# EAGLE board HoloProjector I2C  v1.1 (EAGLE 6.4)
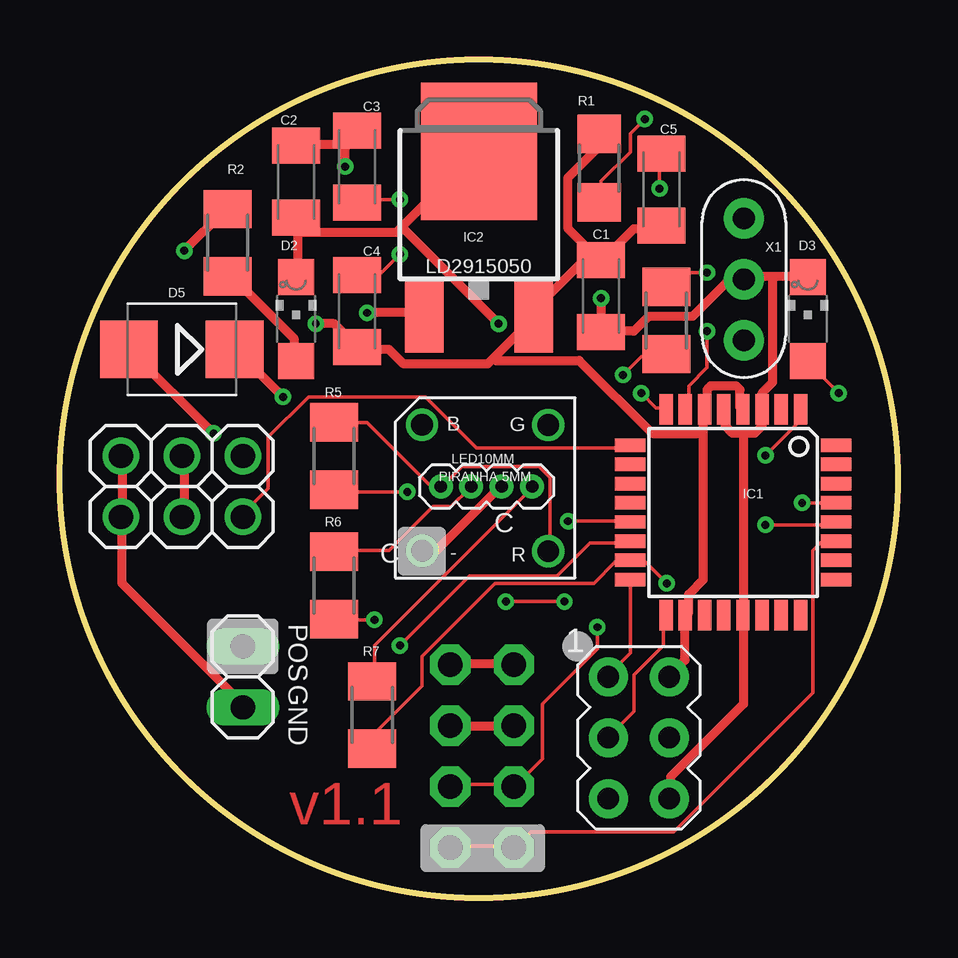
[diagram p0: board, top side]
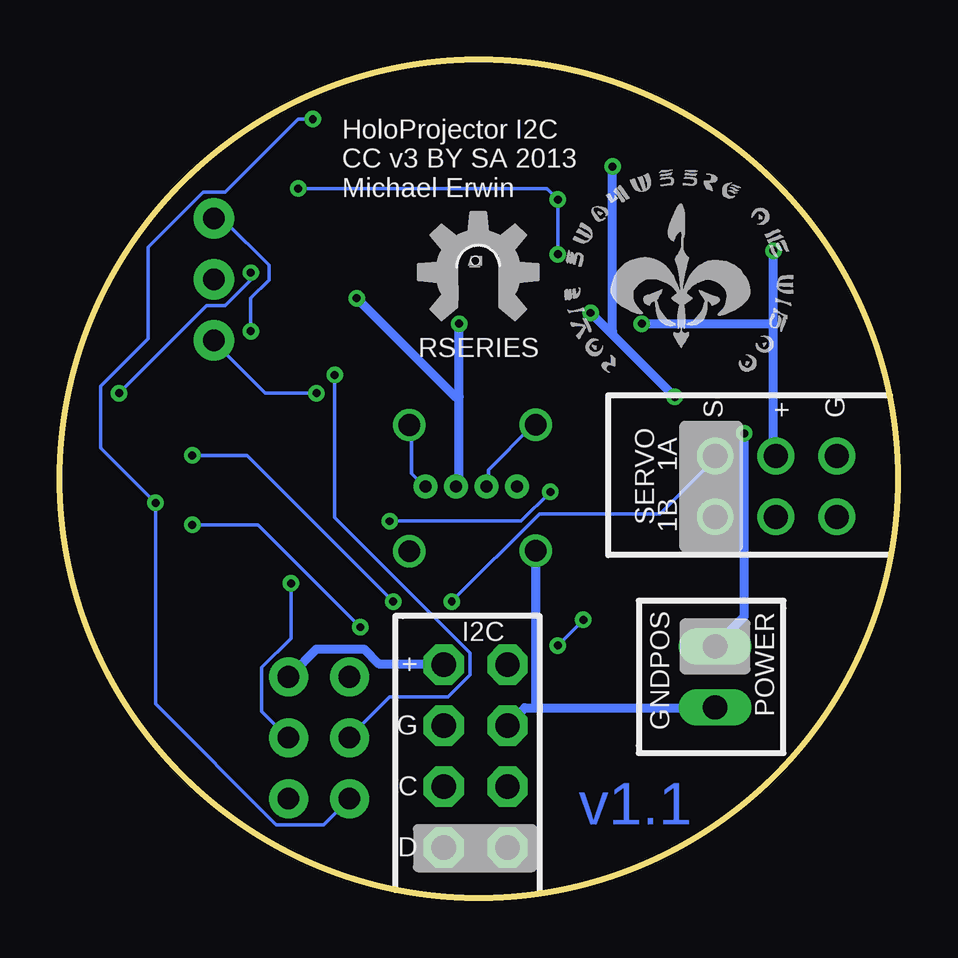
[diagram p1: board, bottom side, seen from below]

Size 34.92 x 34.92 mm. Coordinates in mm from the lower left corner, seen from the top.
Outline: circle at 17.46,17.46 radius 17.46
Copper layers (1*16): Top 0.0356mm / dielectric 1.5011mm / Bottom 0.0356mm
Design rules "LaenPCBOrder *": minimum track width 6mil, minimum drill 13mil, track to track 6mil, track to pad 6mil, pad to pad 6mil, via to via 12mil, smd to smd 6mil, copper to edge 15mil, drill to drill 6mil, minimum pad ring 7mil, minimum via ring 7mil, stop-mask expansion 4mil, vias tented up to drill 14mil, thermal gap 10mil
Net classes: 1 supply: width 0.381 mm, drill 0.152 mm, clearance 0.152 mm

## Footprints (pad centres in the part's own frame; a part is rotated, then mirrored left to right if it is on the bottom)
C1206K = smd 1.5 x 2: 1 -1.5,0; 2 1.5,0
CHIPLED_1206 = smd 1.5 x 1.5: A 0,-1.75; C 0,1.75
SMB = smd 2.4 x 2.4: A 2.2,0; C -2.2,0
1X04-CB = drill 1.016 pad 1.676 octagon: 1 -3.81,0; 2 -1.27,0; 3 1.27,0; 4 3.81,0
TQFP32-08 = smd 1.27 x 0.559: 1 -4.293,2.8; 2 -4.293,2; 3 -4.293,1.2; 4 -4.293,0.4; 5 -4.293,-0.4; 6 -4.293,-1.2; 7 -4.293,-2; 8 -4.293,-2.8; 17 4.293,-2.8; 18 4.293,-2; 19 4.293,-1.2; 20 4.293,-0.4; 21 4.293,0.4; 22 4.293,1.2; 23 4.293,2; 24 4.293,2.8 | smd 0.559 x 1.27: 9 -2.8,-4.293; 10 -2,-4.293; 11 -1.2,-4.293; 12 -0.4,-4.293; 13 0.4,-4.293; 14 1.2,-4.293; 15 2,-4.293; 16 2.8,-4.293; 25 2.8,4.293; 26 2,4.293; 27 1.2,4.293; 28 0.4,4.293; 29 -0.4,4.293; 30 -1.2,4.293; 31 -2,4.293; 32 -2.8,4.293
DPAK = smd 1.6 x 3: 1 -2.28,-5.31; 3 2.28,-5.31 | smd 4.826 x 5.715: 4 0,1.588
AVRISP = drill 0.9 pad 1.626: 1 -1.27,2.54; 2 1.27,2.54; 3 -1.27,0; 4 1.27,0; 5 -1.27,-2.54; 6 1.27,-2.54
1X03 = drill 1.016: 1 -2.54,0; 2 0,0; 3 2.54,0
LED_PIRANHA_5MM = drill 0.9: - -2.684,-2.684; B -2.688,2.574; G 2.575,2.562; R 2.579,-2.696
1X04-1.27MM = drill 0.508 pad 1: 1 0,0; 2 1.27,0; 3 2.54,0; 4 3.81,0
1X02 = drill 1.016 long: 1 -1.27,0; 2 1.27,0
R1206 = smd 1.6 x 1.803: 1 -1.422,0; 2 1.422,0
M1206 = smd 1.6 x 2: 1 -1.4,0; 2 1.4,0
CERM_OSC = drill 0.9 pad 1.676: P$1 -2.54,0; P$2 0,0; P$3 2.54,0

## Placement (x,y rotation side)
C1  0.1uF  [C1206K]  22.54,25.08 270 top
C2  0.1uF  [C1206K]  9.84,29.84 270 top
C3  10uf 25V  [C1206K]  12.38,30.48 270 top
C4  10uf 25V  [C1206K]  12.38,24.45 90 top
C5  0.1uF  [C1206K]  25.08,29.53 90 top
D2  [CHIPLED_1206]  9.84,24.13 0 top
D3  Green  [CHIPLED_1206]  31.18,24.13 0 top
D5  [SMB]  5.08,22.86 180 top
I2C  [1X04-CB]  16.27,5.91 90 top
I2C1  [1X04-CB]  18.92,5.91 90 top
IC1  MEGA48/88/168-AU  [TQFP32-08]  28.07,16.07 270 top
IC2  LM2931_FIXED  [DPAK]  17.46,29.53 0 top
ICSP  AVRISP-6  [AVRISP]  24.13,6.67 0 top
JP1  [1X03]  5.08,18.41 180 top
JP2  [1X03]  5.08,15.88 180 top
LED  LED_PIRANHA_5MM  [LED_PIRANHA_5MM]  17.78,17.14 0 top
LED10MM  [1X04-1.27MM]  15.88,17.14 0 top
POWER  [1X02]  7.62,9.21 90 top
R1  10K  [R1206]  22.48,30.42 270 top
R2  1.0 K  [M1206]  6.99,27.3 270 top
R3  1.0 K  [M1206]  25.27,24.07 90 top
R5  [M1206]  11.43,18.41 270 top
R6  [M1206]  11.43,13.02 270 top
R7  [M1206]  13.02,7.62 270 top
U$2  RSERIES-OSHW-LOGOMEDIUM  [RSERIES-OSHW-LOGO-MEDIUM]  17.59,26.13 0 bottom
U$3  ROYAL-ENGINEERS-OF-NABOOSMALL  [ROYAL-ENGINEERS-OF-NABOO-SMALL]  13.97,21.59 0 bottom
X1  16.00MHz  [CERM_OSC]  28.51,25.78 270 top

## Library data of the parts
C1 C2 C5 D2 D3 R2 R3 R5-R7 = minimidi
C3 C4 = rcl
D5 = diode
I2C I2C1 = carduino
IC1 = avr-7
IC2 = SparkFun-PowerIC
ICSP JP1 JP2 = adafruit
LED = SparkFun-LED
LED10MM = SparkFun-Connectors
POWER = pinhead
R1 = rcl-ez
U$2 U$3 = rseries
X1 = digg

## Nets
+5V [supply]: C1.1 C4.1 C5.1 I2C1.4 I2C.4 IC1.4 IC1.6 IC1.18 IC2.3 ICSP.2 JP1.2 JP2.2 R1.1 R2.1
+9V [supply]: C2.1 C3.1 D5.C IC2.1
ANALOG0: IC1.23
ANALOG1: IC1.24
ANALOG2: IC1.25
ANALOG3: IC1.26
ANALOG4: I2C1.1 I2C.1 IC1.27
ANALOG5: I2C1.2 I2C.2 IC1.28
AREF: IC1.20
DIGITAL2: IC1.32
DIGITAL3: IC1.1 JP1.1
DIGITAL4: IC1.2
DIGITAL5: IC1.9 JP2.1
DIGITAL6: IC1.10
DIGITAL7: IC1.11
DIGITAL8: IC1.12
DIGITAL9: IC1.13 R5.2
DIGITAL10: IC1.14 R6.2
GND [supply]: C1.2 C2.2 D2.C D3.C I2C1.3 I2C.3 IC1.3 IC1.5 IC1.21 IC2.4 ICSP.6 JP1.3 JP2.3 LED10MM.3 LED.- POWER.1 X1.P$2
MISO: IC1.16 ICSP.1
MOSI: IC1.15 ICSP.4 R7.2
N$1: IC1.7 X1.P$1
N$2: IC1.8 X1.P$3
N$3: LED10MM.1 LED.R R5.1
N$4: D3.A R3.2
N$5 [supply]: D2.A R2.2
N$6 [supply]: D5.A POWER.2
N$7: LED10MM.2 LED.B R6.1
N$8: C3.2 C4.2 C5.2
N$9: LED10MM.4 LED.G R7.1
RST: IC1.29 ICSP.5 R1.2
RXD: IC1.30
SCK: IC1.17 ICSP.3 R3.1
TXD: IC1.31

## Tracks (layer width: path | path; a pad name or v marks a point on that pad's centre or on a via)
+5V  (via drill 0.33)
  Top 0.381: I2C.4 16.31,9.75 18.9,9.75 I2C1.4 | IC1.4 28.35,20.42 28.35,21.18 28.19,21.34 27.13,21.34 26.98,21.18 26.98,20.42 IC1.6 26.82,20.27 26.82,19.36 | ICSP.2 25.45,9.3 26.06,9.91 26.06,11.73 IC1.18 26.21,11.89 26.21,12.65 26.82,13.26 26.82,19.36 | v5.18,26.98 6.86,28.65 R2.1 | JP2.2 5.18,16 5.18,18.29 JP1.2 | R1.1 22.4,31.7 22.4,31.24 21.18,30.02 21.18,27.89 22.4,26.67 C1.1 | C5.1 24.99,27.89 23.93,27.89 22.71,26.67 C1.1 | 18.06,22.48 19.66,24.08 IC2.3 19.66,24.38 22.1,26.82 C1.1 | 18.06,22.48 17.83,22.25 14.33,22.25 13.72,22.86 12.5,22.86 C4.1 12.34,23.01 11.43,23.93 v10.67,23.93 | 26.82,19.36 26.67,19.36 24.69,19.36 21.64,22.4 18.14,22.4 18.06,22.48
  Bottom 0.381: I2C1.4 19.05,9.75 21.64,9.75 22.25,10.36 24.23,10.36 25.3,9.3 ICSP.2 | 5.18,23.93 5.18,18.44 JP1.2 | 5.18,23.93 v5.18,26.98 | v10.67,23.93 5.33,23.93 5.18,23.93
+9V  (via drill 0.33)
  Top 0.381: C2.1 9.91,31.39 11.89,31.39 12.34,31.85 C3.1 11.89,31.24 v11.89,30.48 | v9.3,20.88 7.32,22.86 D5.C | v12.8,24.38 14.94,24.38 15.09,24.23 IC2.1
  Bottom 0.381: v12.8,24.38 11.96,23.55 | 11.96,23.55 v9.3,20.88 | v11.89,30.48 11.89,23.62 11.96,23.55
ANALOG4
  Top 0.152: IC1.27 32.31,14.78 31.7,14.78 31.39,14.48 31.39,8.53 25.6,2.74 19.66,2.74 19.05,2.13 I2C1.1 18.9,2.13 16.31,2.13 I2C.1
ANALOG5  (via drill 0.33)
  Top 0.152: v29.41,15.54 32.31,15.54 IC1.28 | v22.4,11.28 22.4,10.36 20.12,8.08 20.12,5.79 19.05,4.72 I2C1.2 18.9,4.72 16.31,4.72 I2C.2
  Bottom 0.152: v29.41,15.54 26.67,15.54 v22.4,11.28
DIGITAL3  (via drill 0.33)
  Top 0.152: v29.41,18.44 30.79,19.81 30.79,20.27 IC1.1 | v18.59,12.34 v21.03,12.34
  Bottom 0.152: v29.41,18.44 27.13,18.44 v21.03,12.34 | v18.59,12.34 14.94,16 9.91,16 7.62,18.29 JP1.1
DIGITAL5
  Top 0.152: IC1.9 23.77,18.75 17.37,18.75 15.24,20.88 10.36,20.88 8.69,19.2 8.69,17.07 7.62,16 JP2.1
DIGITAL9  (via drill 0.33)
  Top 0.152: v21.18,15.7 23.77,15.7 IC1.13 | v14.48,16.92 11.43,16.92 R5.2
  Bottom 0.152: v21.18,15.7 15.7,15.7 v14.48,16.92
DIGITAL10  (via drill 0.33)
  Top 0.152: v14.17,10.52 17.07,13.41 20.73,13.41 22.1,14.78 23.77,14.78 IC1.14 | v13.11,11.58 11.43,11.58 R6.2
  Bottom 0.152: v13.11,11.58 v14.17,10.52
GND  (via drill 0.33)
  Top 0.381: 29.72,25.91 28.65,25.91 X1.P$2 28.35,25.76 27.89,25.76 26.36,24.23 24.54,24.23 23.93,23.62 22.55,23.62 C1.2 22.55,23.77 v22.55,24.99 | 29.72,25.91 31.09,25.91 D3.C | ICSP.6 25.45,4.12 ICSP.6 | IC1.5 27.74,20.42 IC1.5 | 28.5,19.36 28.96,19.36 29.26,19.66 29.26,20.27 IC1.3 | 28.5,19.36 28.04,19.36 27.74,19.66 27.74,20.27 IC1.5 | 28.5,19.36 28.5,19.2 28.5,11.89 IC1.21 28.5,11.58 28.5,8.08 25.45,5.03 25.45,4.27 ICSP.6 | IC1.3 29.26,20.42 IC1.3 | 29.72,25.91 29.72,25.76 29.72,21.49 29.26,21.03 29.26,20.57 IC1.3 | D2.C 9.91,25.91 9.91,28.19 C2.2 10.06,27.74 14.02,27.74 14.25,27.96 | 14.25,27.96 17.37,31.09 IC2.4 | LED10MM.3 18.29,17.07 15.7,14.48 15.24,14.48 LED.- | JP1.3 2.59,18.29 2.59,16 JP2.3 2.59,15.7 2.59,13.11 7.62,8.08 POWER.1 | I2C1.3 18.9,7.16 16.31,7.16 I2C.3 | v18.29,23.93 14.33,27.89 14.25,27.96
  Bottom 0.381: 15.09,7.92 15.54,7.92 16.15,7.32 I2C.3 | 15.09,7.92 7.62,7.92 POWER.1 | LED.- 15.09,14.33 15.09,8.08 15.09,7.92 | 18.29,20.88 18.29,17.22 LED10MM.3 | 18.29,20.88 v18.29,23.93 | v22.55,24.99 18.44,20.88 18.29,20.88
MISO
  Top 0.152: IC1.16 23.77,10.21 22.86,9.3 ICSP.1
MOSI  (via drill 0.33)
  Top 0.152: 23.77,14.02 24.38,14.02 v25.3,13.11 | 23.77,14.02 IC1.15 23.77,14.02 | 23.77,14.02 23.16,14.02 22.25,13.11 18.14,13.11 15.09,10.06 15.09,8.84 13.11,6.86 13.11,6.25 R7.2
  Bottom 0.152: v25.3,13.11 25.3,10.82 26.52,9.6 26.52,7.77 25.45,6.71 ICSP.4
N$1  (via drill 0.33)
  Top 0.152: v26.98,23.62 26.98,22.1 26.21,21.34 26.21,20.42 IC1.7
  Bottom 0.152: v26.98,23.62 26.98,24.99 26.21,25.76 26.21,26.36 28.04,28.19 28.5,28.19 X1.P$1
N$2  (via drill 0.33)
  Top 0.152: v24.23,21.03 24.84,20.42 25.15,20.42 IC1.8
  Bottom 0.152: v24.23,21.03 26.36,21.03 28.5,23.16 X1.P$3
N$3
  Top 0.152: R5.1 12.8,19.81 15.39,17.22 15.85,17.22 LED10MM.1 16,17.22 16.76,17.98 19.96,17.98 20.42,17.53 20.42,14.48 LED.R
N$4  (via drill 0.33)
  Top 0.152: v32.46,21.03 31.24,22.25 D3.A | v26.98,26.06 25.76,26.06 25.3,25.6 R3.2
  Bottom 0.152: v32.46,21.03 28.8,24.69 28.04,24.69 26.98,25.76 v26.98,26.06
N$5
  Top 0.381: D2.A 9.75,22.4 9.75,23.32 7.32,25.76 7.01,25.76 R2.2
N$6  (via drill 0.33)
  Top 0.381: v6.4,19.36 2.9,22.86 D5.A
  Bottom 0.381: v6.4,19.36 6.4,11.73 7.62,10.52 POWER.2
N$7
  Top 0.152: R6.1 11.43,14.48 13.72,14.48 15.54,16.31 16.31,16.31 17.07,17.07 LED10MM.2
  Bottom 0.152: LED.B 15.24,19.66 17.07,17.83 17.07,17.22 LED10MM.2
N$8  (via drill 0.33)
  Top 0.152: v14.17,26.82 13.41,26.06 12.5,26.06 C4.2 | v14.17,29.11 12.5,29.11 C3.2 | v24.99,29.57 24.99,30.94 C5.2
  Bottom 0.152: v14.17,26.82 v14.17,29.11 14.63,29.57 v24.99,29.57
N$9
  Top 0.152: R7.1 13.11,9.14 13.11,10.52 19.66,17.07 LED10MM.4
  Bottom 0.152: LED.G 20.27,19.66 20.27,17.68 19.81,17.22 LED10MM.4
RST  (via drill 0.33)
  Top 0.152: v30.94,16.46 32.31,16.46 IC1.29 | v24.38,32.46 23.77,31.85 23.77,31.09 22.55,29.87 22.55,29.11 R1.2
  Bottom 0.152: ICSP.5 22.86,4.12 23.93,3.05 25.91,3.05 30.94,8.08 v30.94,16.46 33.22,18.75 33.22,21.34 31.24,23.32 31.24,27.13 28.96,29.41 28.04,29.41 24.99,32.46 v24.38,32.46
SCK  (via drill 0.33)
  Top 0.152: IC1.17 25.15,11.73 25.15,10.52 23.93,9.3 23.93,7.77 22.86,6.71 ICSP.3 | v23.47,21.79 24.23,22.55 25.15,22.55 R3.1
  Bottom 0.152: v23.47,21.79 23.47,15.85 17.83,10.21 17.83,9.3 18.75,8.38 21.18,8.38 22.86,6.71 ICSP.3

## Text on the board
Top: v1.1
Bottom: v1.1
tPlace: X1 | POS | GND
_tsilk: R1 | D3 | LD2915050 | C | C
_bsilk: HoloProjector I2C / CC v3 BY SA 2013 / Michael Erwin | RSERIES | G | + | S | 1A | SERVO | 1B | POS | + | G | GND | C | D